# Altium PCB plp-cp_2a.PcbDoc
Units mm, origin at the board's own origin, x right, y up, seen from the top; angles counter-clockwise.
Board outline 34 x 21 mm, 2 copper layers (Top Layer, Bottom Layer), stack 1.071 mm thick; 18 components, 16 nets, 53 pads, 29 vias.
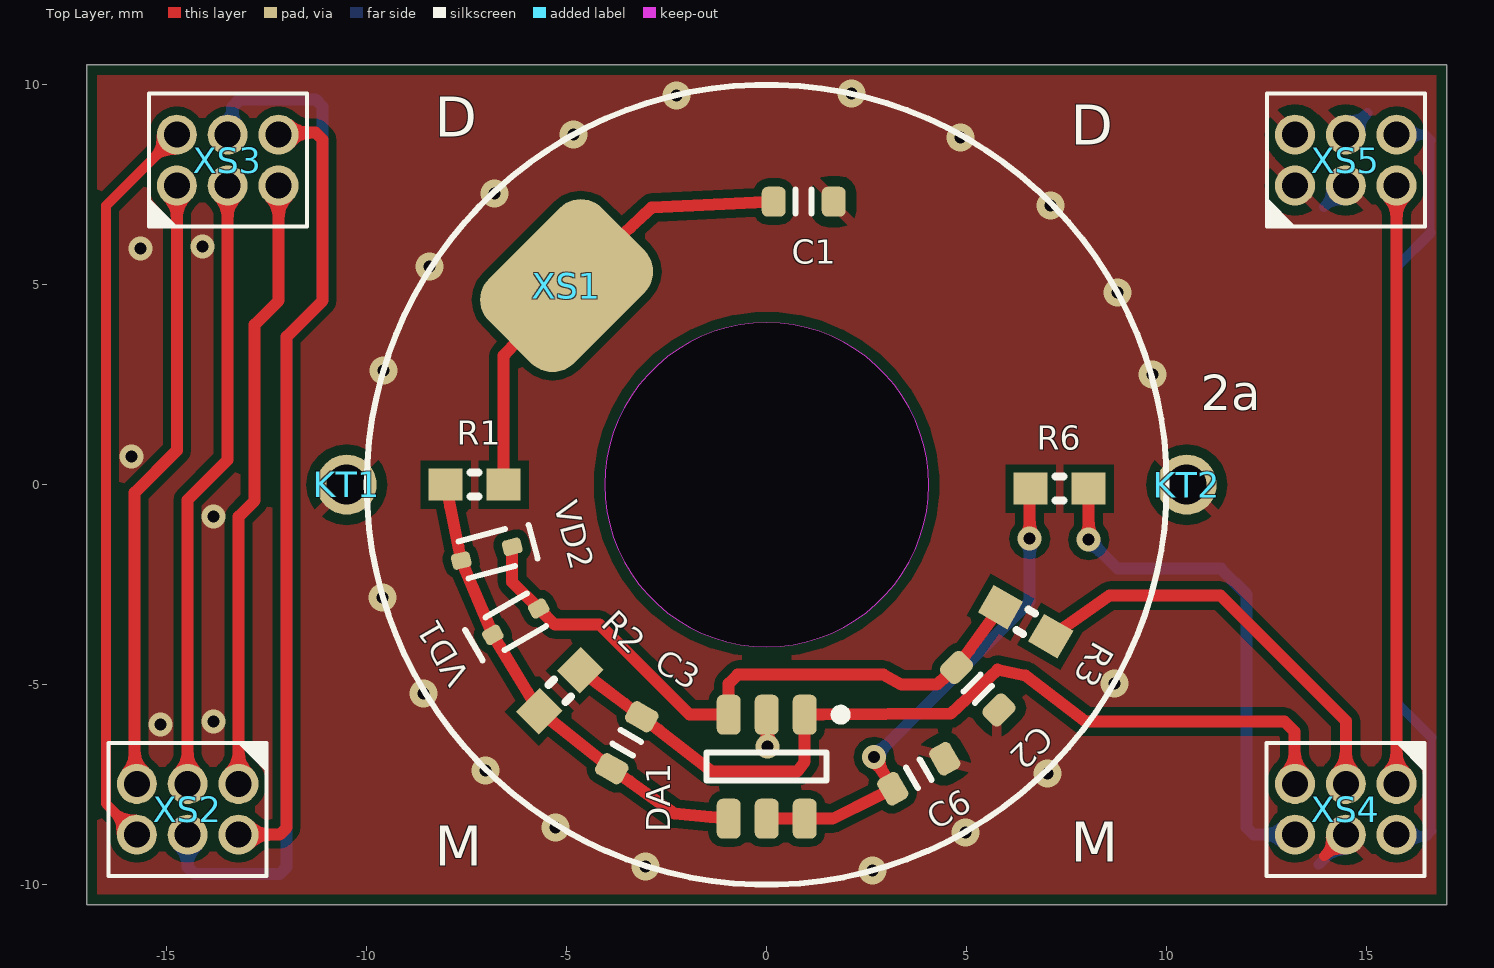
[diagram p0: Top Layer view]
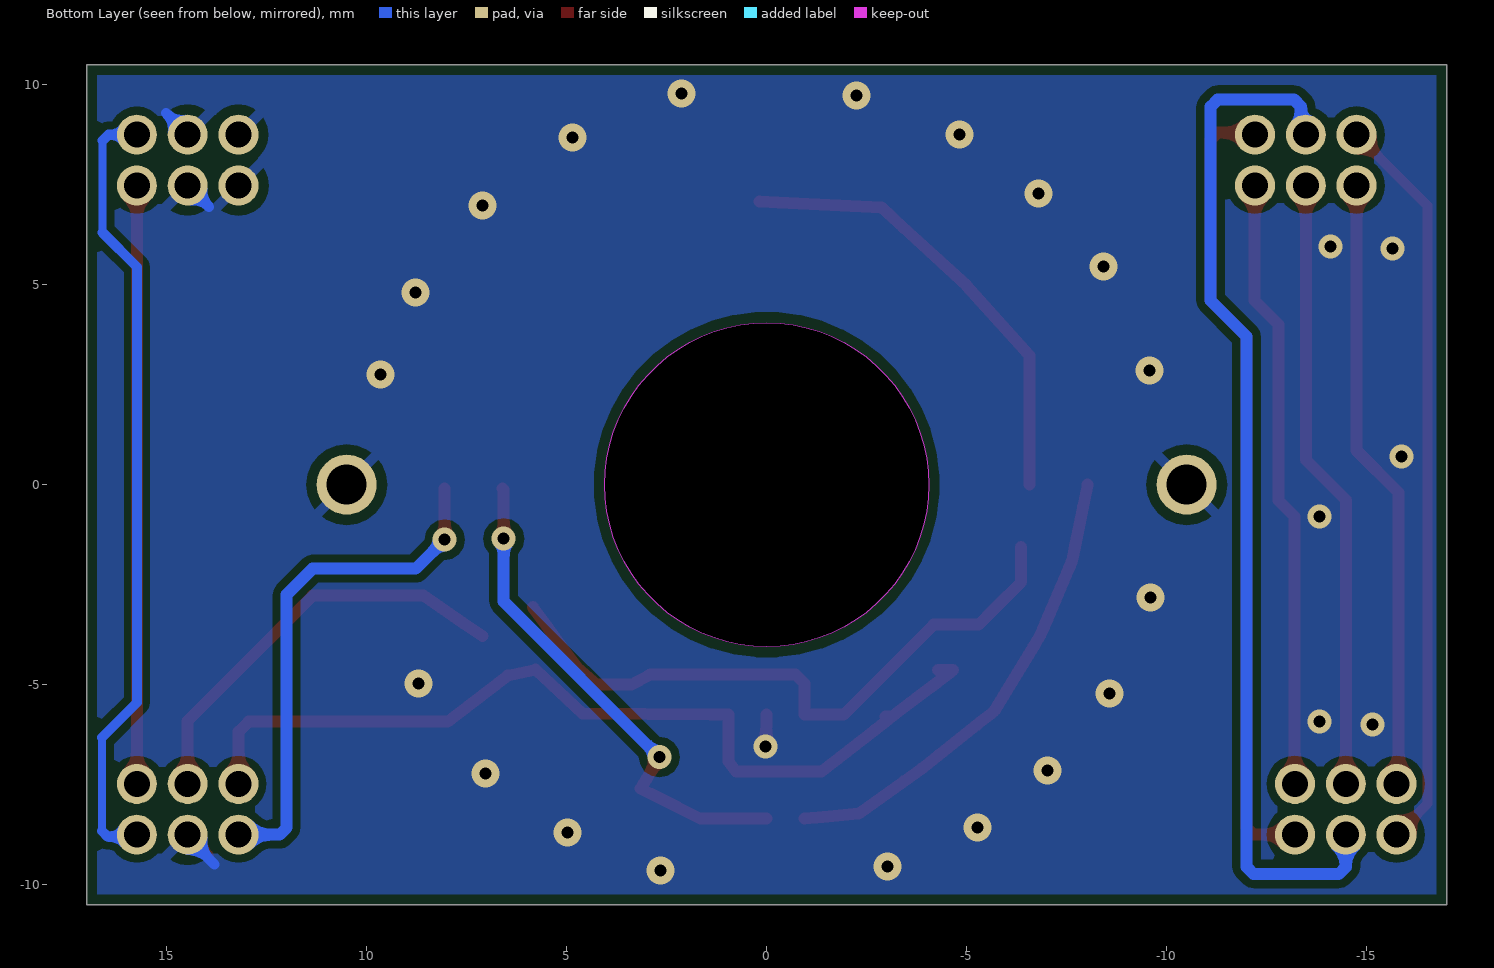
[diagram p1: Bottom Layer view, seen from below]
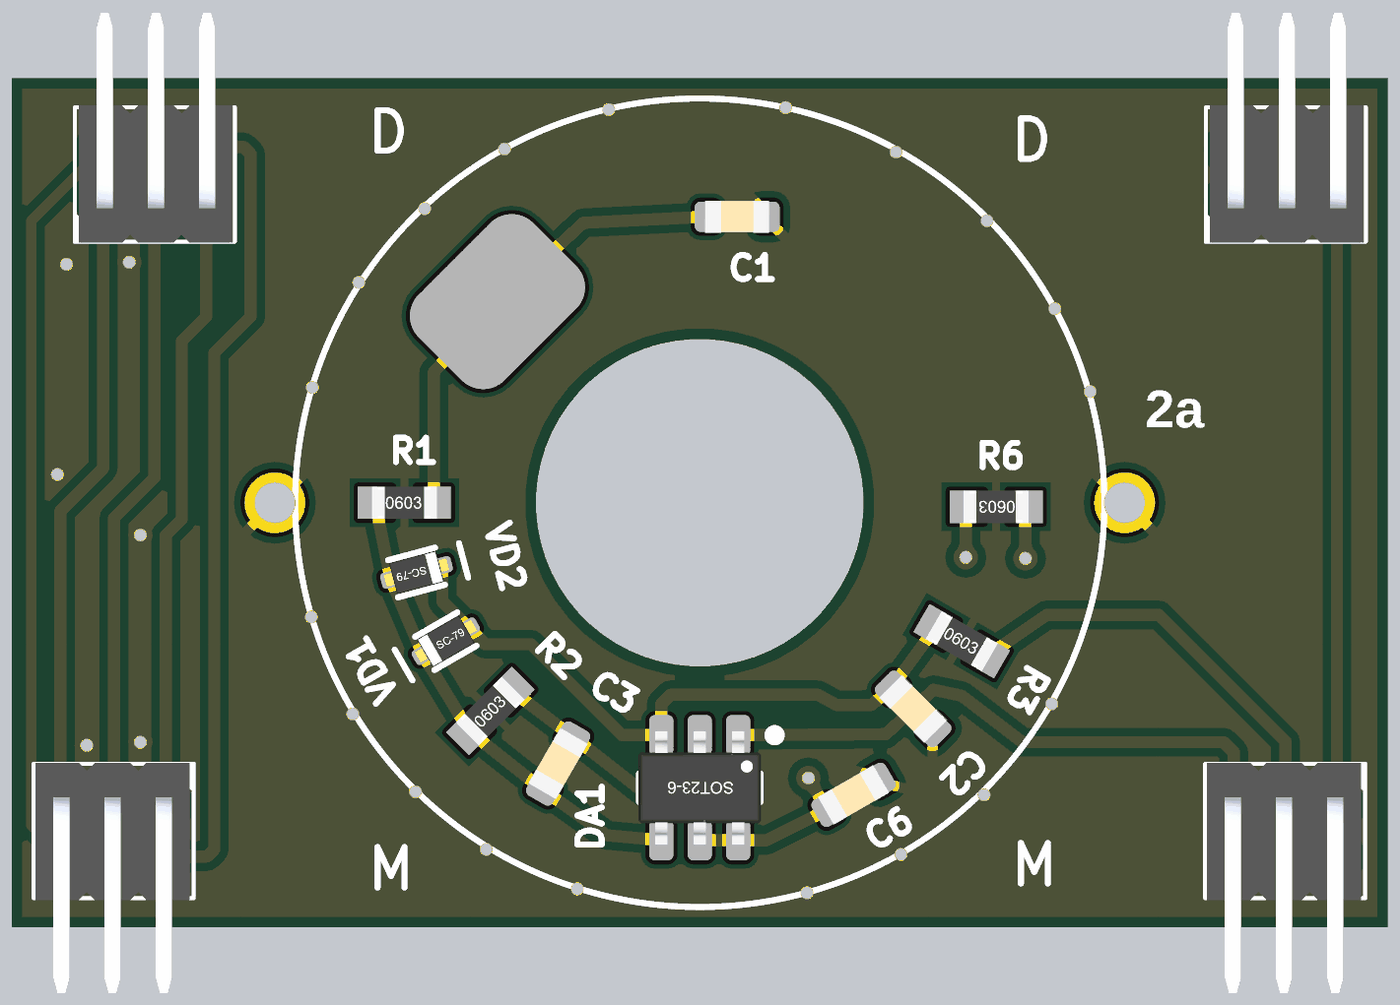
[diagram p2: 3D render of the assembled board from above, using the file's embedded part models]

## Layer stack, top to bottom
Top Solder: solder mask 0.0102, Solder Resist, Dk 3.5
Top Layer: signal copper 0.0356
Dielectric1: core 1, FR-4, Dk 4.8
Bottom Layer: signal copper 0.035
Bottom Solder: solder mask 0.0102, Solder Resist, Dk 3.5

## Board outline
-17,-10.5 -17,10.5 17,10.5 17,-10.5
cut-out: -4.05,0 ccw(c0,0) 0,-4.05 ccw(c0,0) 4.05,0 ccw(c0,0) 0,4.05 ccw(c0,0)

## Design rules (kind name [scope] priority, off if disabled: settings)
AcuteAngle [All] p1: minimum=4.40000000000000E+0001 checktracksonly=FALSE
BoardOutlineClearance [All] p1: gap=0.254 ignorepadtopadclearanceinfootprint=FALSE except(0: Arc-SplitContinuation Track-SplitContinuation SMDPad-SplitContinuation THPad-SplitContinuation Via-SplitContinuation Fill-SplitContinuation Poly-SplitContinuation Region-SplitContinuation Text-SplitContinuation)
Clearance Clearance_Bound [Not (OnBottomLayer Or OnTopLayer) vs IsBoardCutoutRegion Or IsBoardOutline] p1: gap=0.5 ignorepadtopadclearanceinfootprint=FALSE except(0: Arc-Hole Track-Hole SMDPad-Hole THPad-Hole Via-Hole Fill-Hole Poly-Hole Region-Hole Text-Hole)
Clearance Clearance_Poly [inpoly] p2: gap=0.2 ignorepadtopadclearanceinfootprint=FALSE except(0: Arc-Hole Track-Hole SMDPad-Hole THPad-Hole Via-Hole Fill-Hole Poly-Hole Region-Hole Text-Hole)
Clearance Clearance_in [(OnLayer('MidLayer1') OR OnLayer('MidLayer2'))] p3: gap=0.2 ignorepadtopadclearanceinfootprint=FALSE except(0: Arc-Hole Track-Hole SMDPad-Hole THPad-Hole Via-Hole Fill-Hole Poly-Hole Region-Hole Text-Hole)
Clearance Clearance_out [(OnLayer('Bottom Layer') OR OnLayer('Top Layer'))] p4: gap=0.15 ignorepadtopadclearanceinfootprint=FALSE except(0: Arc-Hole Track-Hole SMDPad-Hole THPad-Hole Via-Hole Fill-Hole Poly-Hole Region-Hole Text-Hole)
HoleSize [All] p1: absolutevalues=TRUE maxlimit=2.54 minlimit=0.2 maxpercent=80.000 minpercent=20.000
MinimumAnnularRing [All] p1: minimumring=0.25
MinimumSolderMaskSliver [All] p1: minsoldermaskwidth=0
NetAntennae [All] p1: netantennaetolerance=5
PermittedLayers [All] p1: toplayerpermitted=TRUE bottomlayerpermitted=TRUE
PolygonConnect PolygonConnect_via [isvia] p1: connectstyle=Direct reliefconductorwidth=0.254 reliefentries=4 polygonreliefangle="90 Angle" airgapwidth=0.254
PolygonConnect [All] p2: connectstyle=Relief reliefconductorwidth=0.254 reliefentries=2 polygonreliefangle="45 Angle" airgapwidth=0.254
RoutingVias [All] p1: holewidth=0.3 width=0.8 viastyle="Through Hole" minholewidth=0.2 minwidth=0.6 maxholewidth=0.4 maxwidth=1.27
SMDNeckDown [All] p1: percent=100.000
SMDToCorner [All] p1: distance=59055
SMDToPlane [All] p1: distance=0
ShortCircuit [All] p1: allowed=TRUE
SilkToSilkClearance [All] p1: silktosilkclearance=0.15
SilkToSolderMaskClearance SilkscreenOverComponentPads [IsPad] p1: minsilkscreentomaskgap=0.15 clearancetoexposedcopper=TRUE
SolderMaskExpansion [All] p1: expansion=0.1 istentingtop=FALSE
UnRoutedNet [All] p1: checkbadconnections=TRUE
ViasUnderSMD [All] p1: allowed=TRUE
Width [All] p1: maxlimit=3 minlimit=0.15 preferedwidth=0.25 minimp=50.000000 maximp=50.000000 favimp=50.000000
23 further rules are at their usual default settings.

## Components (designator, comment, footprint, x,y, rotation, side; value= is the part's Value field where it differs from the comment)
C1 "Capacitor Ceramic" CAPC_0603(1608)X080L 0.925,7.075 r0 top value=56pF
C2 "Capacitor Ceramic" CAPC_0603(1608)X080L 5.275,-5.1 r315 top value=0.1uF
C3 "Capacitor Ceramic" CAPC_0603(1608)X080L -3.5,-6.45 r60 top value=10pF
C6 "Capacitor Ceramic" CAPC_0603(1608)X080L 3.8,-7.225 r30 top value=0.1uF
DA1 "OPA363AIDBV" SOT23-6 0.95,-8.35 r180 top
KT1 "Testpoint-TH-1mm" "1mm PAD"#1 -10.525,0.225 r0 top locked net-tie
KT2 "Testpoint-TH-1mm" "1mm PAD"#2 10.475,-0.025 r90 top locked net-tie
R1 "R0603L" RESC1608(0603)X04L -7.3,0 r0 top value=2k4
R2 "R0603L" RESC1608(0603)X04L -5.175,-5.15 r45 top value=620k
R3 "R0603L" RESC1608(0603)X04L 6.475,-3.425 r330 top value=1k
R6 "R0603L" RESC1608(0603)X04L 7.325,-0.1 r180 top value=27
VD1 "BAT54XV2" "SOD523 - ONs" -6.275,-3.425 r210 top
VD2 "BAT54XV2" "SOD523 - ONs" -7,-1.725 r15 top
XS1 "smd_pin" smd_pin 5.49,-0.587 r90 top
XS2 "2199R05-06G-301523" "CON: PLL-6(2x3R1.27male)" -13.206,-7.48 r180 top locked
XS3 "2199R05-06G-301523" "CON: PLL-6(2x3R1.27male)" -14.746,7.48 r0 top locked
XS4 "2199R05-06G-301523" "CON: PLL-6(2x3R1.27male)" 15.746,-7.48 r180 top locked
XS5 "2199R05-06G-301523" "CON: PLL-6(2x3R1.27male)" 13.206,7.48 r0 top locked

## Footprints (in the part's own frame and the unit in brackets; to place one, negate y for a bottom-side part, rotate by r counter-clockwise, add the part's x,y. Pads: shape width x height; smd on the part's side, far side on the other; paste and mask are expansions set on the pad)
"1mm PAD"#1 [mm]
  round 1.5 hole 1: 0(0.025,-0.225)
"1mm PAD"#2 [mm]
  round 1.5 hole 1: 0(0.025,-0.025)
CAPC_0603(1608)X080L [mm] "Chip Capacitor, 2-Leads, Body 1,6x0,8mm, IPC High Density"
  rrect50% 0.6x0.75 smd: 1(-0.75,0) 2(0.75,0)
  silkscreen extent -0.2,-0.3 0.2,0.3, body extent -0.8,-0.4 0.8,0.4, height 0.8
"CON: PLL-6(2x3R1.27male)" [mm]
  round 1 hole 0.65: 1(0,0) 2(0,1.27) 3(1.27,0) 4(1.27,1.27) 5(2.54,0) 6(2.54,1.27)
  silkscreen extent -0.7,-1.02 3.25,2.3, body extent -0.6,-1.05 3.21,4.65, height 4.39
RESC1608(0603)X04L [mm] "Chip Resistor, 2-Leads, Body 1,6x0,8mm, IPC High Density"
  rect 0.85x0.8 smd: 1(-0.725,0) 2(0.725,0)
  silkscreen extent -0.1,-0.3 0.1,0.3, body extent -0.8,-0.4 0.8,0.4, height 0.45
smd_pin [mm]
  rrect50% 4x3 smd rot 135: 1(5.562,10.49)
"SOD523 - ONs" [mm] "SC-79 Molded Diode, 2-Leads, Body 1,2x0,8mm, IPC High Density"
  rrect50% 0.48x0.4 smd: 1(-0.66,0) 2(0.66,0)
  silkscreen extent -0.6,-0.48 1.2,0.47, body extent -0.8,-0.4 0.8,0.4, height 0.62
SOT23-6 [mm] "SOT23, 6-Leads, Body 3,0x3,0mm (max), Pitch 0,95mm, IPC High Density"
  rrect50% 0.6x1 smd: 1(0,-2.6) 2(0.95,-2.6) 3(1.9,-2.6) 4(1.9,0) 5(0.95,0) 6(0,0)
  silkscreen extent -1.03,-2.72 2.45,-0.95, body extent -0.56,-2.7 2.46,0.1, height 1.25

## Part data
C1 C3: "Конденсатор", Case=0603, Manufacturer=Murata, Rated DC Voltage=50V, ReplacementPart1Manufacturer=TDK, ReplacementPart2Manufacturer="Taiyo Yuden", Temperature Range="-55 to +125°C", Tolerance=±5%, ComponentLink1Description="Global Data", ComponentLink1URL=http://www.murata.com/products/capacitor/tech_data/index.html, ComponentLink2Description="Part Data Sheet", ComponentLink3Description="Replacement Data Sheet", ComponentLink4Description="Replacement 2 Data Sheet", ESR="* mOhm", TC Code=NPO
  C1: OrderCode="0603 - 56пФ ±10% - 50В - NPO"
  C3: OrderCode="0603 - 10 пФ ±5% 50 В- NPO"
C2 C6: "Конденсатор", Case=0603, Manufacturer=Murata, Rated DC Voltage=50V, ReplacementPart1Manufacturer=TDK, ReplacementPart2Manufacturer="Taiyo Yuden", Temperature Range="-55 to +125°C", Tolerance=±10%, ComponentLink1Description="Global Data", ComponentLink1URL=http://www.murata.com/products/capacitor/tech_data/index.html, ComponentLink2Description="Part Data Sheet", ComponentLink3Description="Replacement Data Sheet", ComponentLink4Description="Replacement 2 Data Sheet", ESR="* mOhm", OrderCode="0603 - 0,1мкФ ±10% - 50В - X7R", TC Code=X7R
DA1: "Микросхема", Manufacturer="Texas Instruments", ComponentLink1Description="Data Sheet", ComponentLink1URL=http://focus.ti.com/lit/ds/symlink/opa363.pdf, ComponentLink2Description="Replacement 1 Data Sheet", ComponentLink3Description="Replacement 2 Data Sheet", PartNumber=OPA363AIDBV
KT1 KT2: "Dummy Pad"
R1 R3 R6: "Резистор", Case=0603, Manufacturer=Bourns, Max Rated DC Voltage="100 В", Power="1/10 Вт", Rated DC Voltage="50 В", Resistance Code="0603 {Value} Ом ±1 %", Temperature Range="-55 to +125°C", Tolerance="±1 %", ComponentLink1Description="Data Sheet", ComponentLink1URL=http://smd.ru/files/upload/1207/ru/chip-resis.pdf, ComponentLink2Description="Specific Res Only", ComponentLink3Description="Replacement Data Sheet", ComponentLink4Description="Replacement 2 Data Sheet", Rated T="-55 °C to +125 °C", TKR="±100 ppm"
R2: "Резистор", Case=0603, Manufacturer=Bourns, Max Rated DC Voltage="100 В", Power="1/10 Вт", Rated DC Voltage="50 В", Resistance Code="0603 240 kОм ±1 %", Temperature Range="-55 to +125°C", Tolerance="±1 %", ComponentLink1Description="Data Sheet", ComponentLink1URL=http://smd.ru/files/upload/1207/ru/chip-resis.pdf, ComponentLink2Description="Specific Res Only", ComponentLink3Description="Replacement Data Sheet", ComponentLink4Description="Replacement 2 Data Sheet", Rated T="-55 °C to +125 °C", TKR="±100 ppm"
VD1 VD2: "shottky diode", Manufacturer="ON Semiconductor", ComponentLink1Description="Data Sheet", ComponentLink2Description="Replacement 1 Data Sheet", ComponentLink3Description="Replacement 2 Data Sheet"
XS2 XS3 XS4 XS5: library part 2199R05-06G-301523Out, "Step 1.27 R"

## Via types
v1: diameter 0.7, hole 0.3, Top Layer to Bottom Layer, tented both sides, 19 vias
v2: diameter 0.6, hole 0.3, Top Layer to Bottom Layer, tented both sides, 10 vias

## Nets (pads, with @x,y where several pads share a name; then routed paths per layer and width w, separated by ;. In a path a pad name is that pad's centre, name@x,y a point inside that pad or via, vN(x,y) a via of type N, cw(c..) or ccw(c..) an arc to the next point about the centre after c; other vN are vias at no path point)
1: C3.2 DA1.1 R2.2 XS4.5 | length 22.8
  Top Layer w0.3: R2.2@-4.288,-4.637 R2.2 -4.221,-4.971 -3.556,-5.474 C3.2 ; C3.2@-2.975,-5.8 C3.2 ; XS4.5 13.2,-7.474 13.2,-6.175 12.95,-5.925 7.975,-5.925 6.475,-4.775 5.775,-4.625 4.6,-5.725 1.412,-5.747 DA1.1 0.95,-6.925 0.763,-7.175 -1.364,-7.175 -2.698,-6.133 -3.031,-5.873 C3.2
1c: XS2.3 XS3.3 | length 15.4
  Top Layer w0.3: XS2.3 -14.476,-0.376 -13.476,0.624 XS3.3
2: C1.2 C2.2 C6.2 DA1.2 KT1.0 KT2.0 XS4.4 XS5.1 XS5.2 XS5.3 XS5.4 | length 4.1
  Top Layer w0.25: 13.938,-9.288 XS4.4
  Top Layer w0.3: DA1.2 0.021,-6.412 v2(0.025,-6.55)
  Bottom Layer w0.25: 13.8,-9.5 14.476,-8.824 XS4.4 ; 13.938,6.942 XS5.3 ; XS5.4 15.014,9.288
  other v1: 2.65,-9.65 -3.025,-9.55 4.975,-8.7 -5.275,-8.575 7.025,-7.225 -7.025,-7.15 -8.575,-5.225 8.7,-4.975 -9.6,-2.825 9.65,2.75 -9.575,2.85 8.775,4.8 -8.425,5.45 7.1,6.975 -6.8,7.275 4.85,8.675 -4.825,8.75 -2.25,9.725 2.125,9.775
  other v2: -15.15,-6 -13.825,-5.925 -13.825,-0.8 -15.875,0.7 -15.65,5.9 -14.1,5.95
2c: XS2.4 XS3.4 | length 26
  Bottom Layer w0.3: XS2.4 -14.476,-9.559 -14.3,-9.734 -12.176,-9.734 -12,-9.559 -12,3.7 -11.1,4.6 -11.1,9.454 -11.276,9.629 -13.181,9.629 -13.357,9.454 -13.357,8.869 XS3.4
3: R3.2 XS4.3 | length 10.6
  Top Layer w0.3: R3.2 7.592,-3.451 8.575,-2.775 11.35,-2.775 14.476,-5.901 XS4.3
3c: XS2.1 XS3.5 | length 15.4
  Top Layer w0.3: XS2.1 -13.2,-7.474 -13.2,-0.8 -12.8,-0.4 -12.8,4 -12.2,4.6 -12.2,7.474 XS3.5
4: R6.1 XS4.6 | length 12.9
  Top Layer w0.3: v2(8.05,-1.375) R6.1
  Bottom Layer w0.3: v2(8.05,-1.375) 8.775,-2.1 11.355,-2.1 12,-2.745 12,-8.574 12.176,-8.75 XS4.6
4c: XS2.2 XS3.6 | length 20
  Top Layer w0.3: XS2.2 -12.176,-8.75 -12,-8.574 -12,3.7 -11.1,4.6 -11.1,8.624 -11.276,8.8 -12.156,8.8 XS3.6
NET: XS2.5 XS3.1 | length 15.4
  Top Layer w0.3: XS2.5 -15.8,-7.426 -15.8,-0.2 -14.746,0.854 XS3.1
NET2: XS4.2 XS5.6 | length 19.8
  Bottom Layer w0.2: 16.6,6.3 16.6,8.602 ; 16.621,-8.654 16.621,-6.321
  Bottom Layer w0.25: XS4.2 15.796,-8.8 16.475,-8.8 16.621,-8.654 ; XS5.6 16.452,8.75 16.6,8.602 ; 16.6,6.3 15.746,5.446 15.746,-5.446 16.621,-6.321
NET3: XS2.6 XS3.2 | length 18.6
  Top Layer w0.25: XS2.6 -16.521,-7.975 -16.521,6.975 XS3.2
NetC1_1: C1.1 R1.2 XS1.1 | length 11.5
  Top Layer w0.3: R1.2 -6.575,3.225 -6.447,3.368 XS1.1 -3.407,6.437 -2.875,6.925 -0.287,7.052 C1.1
NetC2_1: C2.1 DA1.3 R3.1 VD1.1 VD2.2 | length 16.3
  Top Layer w0.3: VD2.2 -6.362,-2.436 VD1.1 -5.298,-3.5 -4.175,-3.5 -1.925,-5.75 DA1.3 -0.95,-4.975 -0.725,-4.75 2.92,-4.75 3.375,-5 4.25,-5 4.339,-4.923 C2.1 5.065,-4.132 5.521,-3.508 R3.1
NetC3_1: C3.1 DA1.4 R1.1 R2.1 VD1.2 VD2.1 | length 11.8
  Top Layer w0.3: R1.1 -7.913,-0.547 -7.709,-1.544 VD2.1 -7.496,-2.227 -6.987,-3.424 VD1.2 -6.661,-4.061 -5.979,-5.183 R2.1 -5.255,-6.006 -4.299,-6.763 C3.1 -3.436,-7.413 -2.3,-8.225 -1.412,-8.307 DA1.4
NetC6_1: C6.1 DA1.5 DA1.6 R6.2 | length 12.6
  Top Layer w0.3: DA1.5 DA1.6 1.65,-8.35 2.736,-7.807 C6.1 v2(2.684,-6.81) ; v2(6.575,-1.35) 6.575,-0.125 R6.2
  Bottom Layer w0.3: v2(2.684,-6.81) 6.575,-2.918 v2(6.575,-1.35)
RESET: XS4.1 XS5.5 | length 15
  Top Layer w0.3: XS4.1 XS5.5

## Polygon pours and split planes (outlines as drawn)
no net on Bottom Solder "Top Solder-No Net" (solid): 3.474,-2.524 ccw(c-0.025,-0.025) 3.421,2.547 4.9,2.547 4.913,2.544 cw(c0.019,0.033) 4.891,-2.52 4.891,-2.525
no net on Bottom Solder "Top Solder-No Net" (solid): -3.524,2.524 ccw(c-0.025,0.025) -3.471,-2.547 -4.95,-2.547 -4.963,-2.544 cw(c-0.069,-0.033) -4.941,2.52 -4.941,2.525
no net on Bottom Solder "Bottom Layer-No Net" (solid): -2.875,10.175 -2.875,7.65 2.825,7.65 2.825,10.25 -2.875,10.25
no net on Bottom Solder "Bottom Layer-No Net" (solid): -2.85,-7.725 -2.85,-10.25 2.85,-10.25 2.85,-7.65 -2.85,-7.65
2 on Top Layer "NONET_L02_P-001" (solid, pour order 3): -17,10.5 17,10.5 17,-10.5 -17,-10.5
2 on Bottom Layer "NONET_L02_P-001" (solid, pour order 4): -17,10.5 17,10.5 17,-10.5 -17,-10.5

## Silkscreen, mask and mechanical layers (free items; w line width, h text height)
Top Overlay:
  circle w0.15: c0,0 r10
  text "D" at -8.3,8.7 h1
  text "D" at 7.6,8.5 h1
  text "2a" at 10.85,1.575 h1.5
  text "M" at 7.6,-9.425 h1
  text "M" at -8.3,-9.525 h1
Bottom Solder:
  lines w0.1: -4.963,-2.544 cw(c-0.069,-0.033) -4.941,2.52 ; -4.95,-2.547 -3.471,-2.547 cw(c-0.025,0.025) -3.524,2.524 ; -4.941,2.525 -3.525,2.525 ; 3.529,-2.52 4.945,-2.52 ; 3.534,-2.515 ccw(c0.035,-0.016) 3.481,2.556 4.96,2.556 cw(c0.066,0.045) 4.934,-2.514
  text "plp-cp_2a" at 3.625,-6.125 h1
Mechanical 1:
  circle w0.1: c0,0 r10.25
Mechanical 4:
  circle w0.1: c0,0 r4.1
  lines w0.1: -17,-10.5 -17,10.5 17,10.5 17,-10.5 -17,-10.5